# EAGLE board LIGHT MODULE-Panel (EAGLE 9.6.2), part 1 of 2
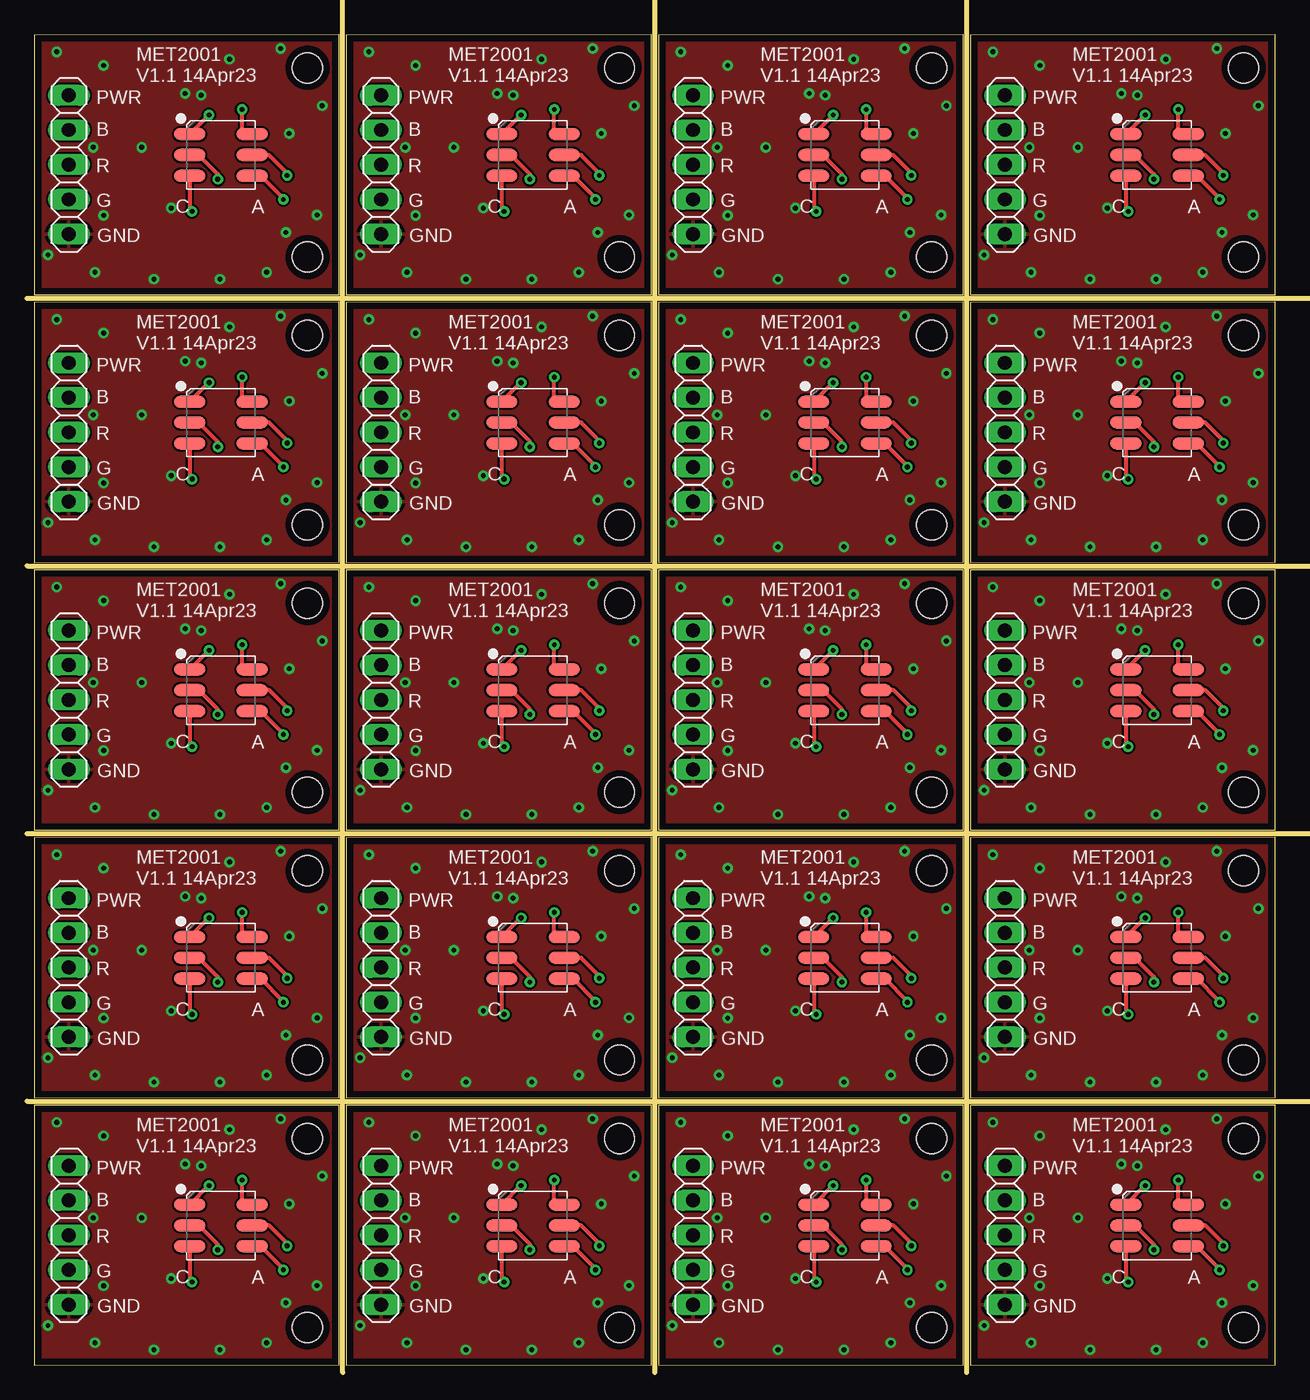
[diagram p0: board, top side]
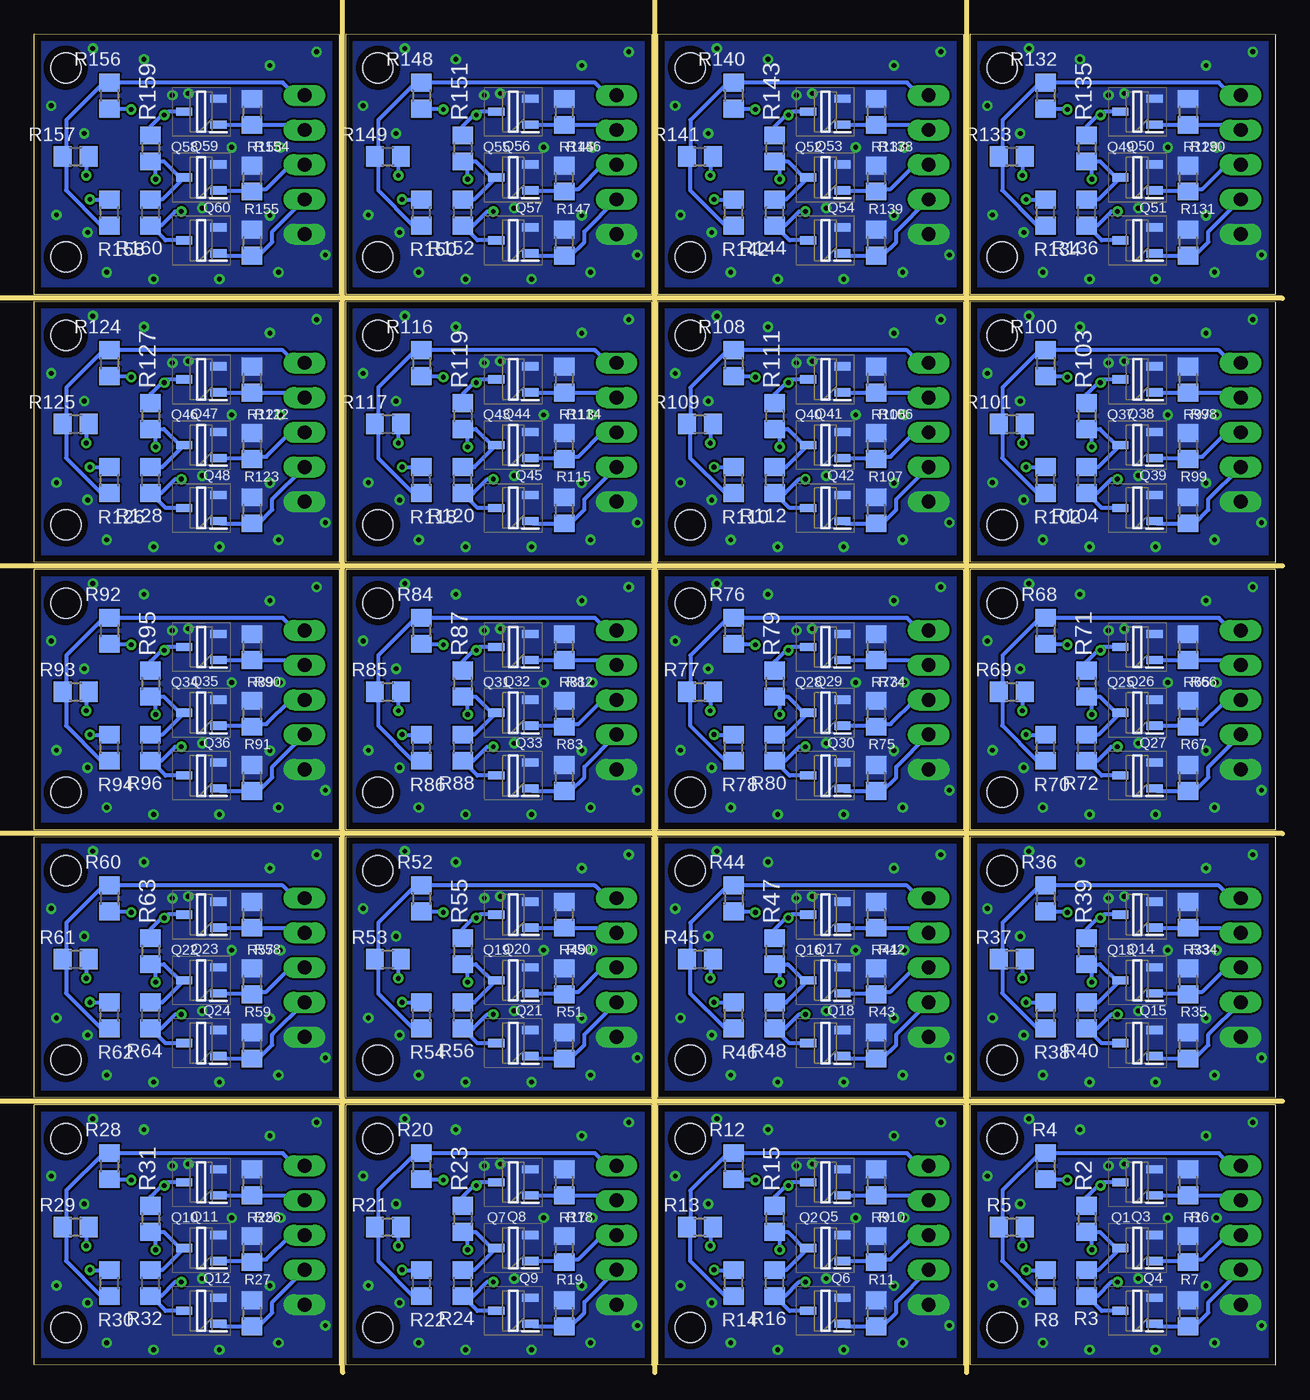
[diagram p1: board, bottom side, seen from below]

Size 90.84 x 97.42 mm. Coordinates in mm from the lower left corner, seen from the top.
Outline: 0,0 22.33,0.03 22.33,19.07 0,19.05 0,0
Outline: 22.84,0 45.16,0.03 45.16,19.07 22.84,19.05 22.84,0
Outline: 45.67,0 68,0.03 68,19.07 45.67,19.05 45.67,0
Outline: 68.51,0 90.83,0.03 90.83,19.07 68.51,19.05 68.51,0
Outline: 0,19.59 22.33,19.61 22.33,38.66 0,38.64 0,19.59
Outline: 22.84,19.59 45.16,19.61 45.16,38.66 22.84,38.64 22.84,19.59
Outline: 45.67,19.59 68,19.61 68,38.66 45.67,38.64 45.67,19.59
Outline: 68.51,19.59 90.83,19.61 90.83,38.66 68.51,38.64 68.51,19.59
Outline: 0,39.17 22.33,39.2 22.33,58.25 0,58.22 0,39.17
Outline: 22.84,39.17 45.16,39.2 45.16,58.25 22.84,58.22 22.84,39.17
Outline: 45.67,39.17 68,39.2 68,58.25 45.67,58.22 45.67,39.17
Outline: 68.51,39.17 90.83,39.2 90.83,58.25 68.51,58.22 68.51,39.17
Outline: 0,58.76 22.33,58.78 22.33,77.83 0,77.81 0,58.76
Outline: 22.84,58.76 45.16,58.78 45.16,77.83 22.84,77.81 22.84,58.76
Outline: 45.67,58.76 68,58.78 68,77.83 45.67,77.81 45.67,58.76
Outline: 68.51,58.76 90.83,58.78 90.83,77.83 68.51,77.81 68.51,58.76
Outline: 0,78.34 22.33,78.37 22.33,97.42 0,97.39 0,78.34
Outline: 22.84,78.34 45.16,78.37 45.16,97.42 22.84,97.39 22.84,78.34
Outline: 45.67,78.34 68,78.37 68,97.42 45.67,97.39 45.67,78.34
Outline: 68.51,78.34 90.83,78.37 90.83,97.42 68.51,97.39 68.51,78.34
Copper layers (1*16): Top 0.035mm / dielectric 1.5mm / Bottom 0.035mm
Design rules "LIGHT MODULE": minimum track width 10mil, minimum drill 0.35mm, track to track 6mil, track to pad 6mil, pad to pad 6mil, via to via 6mil, smd to smd 6mil, copper to edge 20mil, drill to drill 6mil, minimum pad ring 10mil, minimum via ring 8mil, stop-mask expansion 4mil, vias tented up to drill 15mil, thermal gap 10mil
Holes 2.2 mm at 20,2.77 20,16.61 42.84,2.77 42.84,16.61 65.67,2.77 65.67,16.61 88.51,2.77 88.51,16.61 20,22.36 20,36.19 42.84,22.36 42.84,36.19 65.67,22.36 65.67,36.19 88.51,22.36 88.51,36.19 20,41.94 20,55.78 42.84,41.94 42.84,55.78 65.67,41.94 65.67,55.78 88.51,41.94 88.51,55.78 20,61.53 20,75.36 42.84,61.53 42.84,75.36 65.67,61.53 65.67,75.36 88.51,61.53 88.51,75.36 20,81.11 20,94.95 42.84,81.11 42.84,94.95 65.67,81.11 65.67,94.95 88.51,81.11 88.51,94.95
Milling: 7 lines

## Footprints (pad centres in the part's own frame; a part is rotated, then mirrored left to right if it is on the bottom)
HEADER_1X5 = drill 1.016 long: 1 -6.35,0; 2 -3.81,0; 3 -1.27,0; 4 1.27,0; 5 3.81,0
LED6-SMD-5050 = smd 2.286 x 0.889: 1 -2.286,1.524; 2 -2.286,0; 3 -2.286,-1.524; 4 2.286,-1.524; 5 2.286,0; 6 2.286,1.524
SOT95P280X125-3N = smd 1.2 x 0.6: 1 -1.25,0.95; 2 -1.25,-0.95; 3 1.25,0
R0805 = smd 1.3 x 1.5: 1 -0.95,0; 2 0.95,0

## Placement (x,y rotation side)
CN1  [HEADER_1X5]  2.54,10.79 90 top
CN2  [HEADER_1X5]  25.38,10.79 90 top
CN3  [HEADER_1X5]  48.21,10.79 90 top
CN4  [HEADER_1X5]  71.05,10.79 90 top
CN5  [HEADER_1X5]  2.54,30.38 90 top
CN6  [HEADER_1X5]  25.38,30.38 90 top
CN7  [HEADER_1X5]  48.21,30.38 90 top
CN8  [HEADER_1X5]  71.05,30.38 90 top
CN9  [HEADER_1X5]  2.54,49.97 90 top
CN10  [HEADER_1X5]  25.38,49.97 90 top
CN11  [HEADER_1X5]  48.21,49.97 90 top
CN12  [HEADER_1X5]  71.05,49.97 90 top
CN13  [HEADER_1X5]  2.54,69.55 90 top
CN14  [HEADER_1X5]  25.38,69.55 90 top
CN15  [HEADER_1X5]  48.21,69.55 90 top
CN16  [HEADER_1X5]  71.05,69.55 90 top
CN17  [HEADER_1X5]  2.54,89.14 90 top
CN18  [HEADER_1X5]  25.38,89.14 90 top
CN19  [HEADER_1X5]  48.21,89.14 90 top
CN20  [HEADER_1X5]  71.05,89.14 90 top
D1  SMD-RGB-HI-LIGHT(6P-L5.0W5.0*H1.5MM)-5050  [LED6-SMD-5050]  13.67,10.24 0 top
D2  SMD-RGB-HI-LIGHT(6P-L5.0W5.0*H1.5MM)-5050  [LED6-SMD-5050]  36.5,10.24 0 top
D3  SMD-RGB-HI-LIGHT(6P-L5.0W5.0*H1.5MM)-5050  [LED6-SMD-5050]  59.34,10.24 0 top
D4  SMD-RGB-HI-LIGHT(6P-L5.0W5.0*H1.5MM)-5050  [LED6-SMD-5050]  82.17,10.24 0 top
D5  SMD-RGB-HI-LIGHT(6P-L5.0W5.0*H1.5MM)-5050  [LED6-SMD-5050]  13.67,29.82 0 top
D6  SMD-RGB-HI-LIGHT(6P-L5.0W5.0*H1.5MM)-5050  [LED6-SMD-5050]  36.5,29.82 0 top
D7  SMD-RGB-HI-LIGHT(6P-L5.0W5.0*H1.5MM)-5050  [LED6-SMD-5050]  59.34,29.82 0 top
D8  SMD-RGB-HI-LIGHT(6P-L5.0W5.0*H1.5MM)-5050  [LED6-SMD-5050]  82.17,29.82 0 top
D9  SMD-RGB-HI-LIGHT(6P-L5.0W5.0*H1.5MM)-5050  [LED6-SMD-5050]  13.67,49.41 0 top
D10  SMD-RGB-HI-LIGHT(6P-L5.0W5.0*H1.5MM)-5050  [LED6-SMD-5050]  36.5,49.41 0 top
D11  SMD-RGB-HI-LIGHT(6P-L5.0W5.0*H1.5MM)-5050  [LED6-SMD-5050]  59.34,49.41 0 top
D12  SMD-RGB-HI-LIGHT(6P-L5.0W5.0*H1.5MM)-5050  [LED6-SMD-5050]  82.17,49.41 0 top
D13  SMD-RGB-HI-LIGHT(6P-L5.0W5.0*H1.5MM)-5050  [LED6-SMD-5050]  13.67,68.99 0 top
D14  SMD-RGB-HI-LIGHT(6P-L5.0W5.0*H1.5MM)-5050  [LED6-SMD-5050]  36.5,68.99 0 top
D15  SMD-RGB-HI-LIGHT(6P-L5.0W5.0*H1.5MM)-5050  [LED6-SMD-5050]  59.34,68.99 0 top
D16  SMD-RGB-HI-LIGHT(6P-L5.0W5.0*H1.5MM)-5050  [LED6-SMD-5050]  82.17,68.99 0 top
D17  SMD-RGB-HI-LIGHT(6P-L5.0W5.0*H1.5MM)-5050  [LED6-SMD-5050]  13.67,88.58 0 top
D18  SMD-RGB-HI-LIGHT(6P-L5.0W5.0*H1.5MM)-5050  [LED6-SMD-5050]  36.5,88.58 0 top
D19  SMD-RGB-HI-LIGHT(6P-L5.0W5.0*H1.5MM)-5050  [LED6-SMD-5050]  59.34,88.58 0 top
D20  SMD-RGB-HI-LIGHT(6P-L5.0W5.0*H1.5MM)-5050  [LED6-SMD-5050]  82.17,88.58 0 top
Q1  AO3400  [SOT95P280X125-3N]  10.1,8.59 180 bottom
Q2  AO3400  [SOT95P280X125-3N]  32.94,8.59 180 bottom
Q3  AO3400  [SOT95P280X125-3N]  10.1,13.4 180 bottom
Q4  AO3400  [SOT95P280X125-3N]  10.1,3.99 180 bottom
Q5  AO3400  [SOT95P280X125-3N]  32.94,13.4 180 bottom
Q6  AO3400  [SOT95P280X125-3N]  32.94,3.99 180 bottom
Q7  AO3400  [SOT95P280X125-3N]  55.77,8.59 180 bottom
Q8  AO3400  [SOT95P280X125-3N]  55.77,13.4 180 bottom
Q9  AO3400  [SOT95P280X125-3N]  55.77,3.99 180 bottom
Q10  AO3400  [SOT95P280X125-3N]  78.61,8.59 180 bottom
Q11  AO3400  [SOT95P280X125-3N]  78.61,13.4 180 bottom
Q12  AO3400  [SOT95P280X125-3N]  78.61,3.99 180 bottom
Q13  AO3400  [SOT95P280X125-3N]  10.1,28.17 180 bottom
Q14  AO3400  [SOT95P280X125-3N]  10.1,32.98 180 bottom
Q15  AO3400  [SOT95P280X125-3N]  10.1,23.57 180 bottom
Q16  AO3400  [SOT95P280X125-3N]  32.94,28.17 180 bottom
Q17  AO3400  [SOT95P280X125-3N]  32.94,32.98 180 bottom
Q18  AO3400  [SOT95P280X125-3N]  32.94,23.57 180 bottom
Q19  AO3400  [SOT95P280X125-3N]  55.77,28.17 180 bottom
Q20  AO3400  [SOT95P280X125-3N]  55.77,32.98 180 bottom
Q21  AO3400  [SOT95P280X125-3N]  55.77,23.57 180 bottom
Q22  AO3400  [SOT95P280X125-3N]  78.61,28.17 180 bottom
Q23  AO3400  [SOT95P280X125-3N]  78.61,32.98 180 bottom
Q24  AO3400  [SOT95P280X125-3N]  78.61,23.57 180 bottom
Q25  AO3400  [SOT95P280X125-3N]  10.1,47.76 180 bottom
Q26  AO3400  [SOT95P280X125-3N]  10.1,52.57 180 bottom
Q27  AO3400  [SOT95P280X125-3N]  10.1,43.16 180 bottom
Q28  AO3400  [SOT95P280X125-3N]  32.94,47.76 180 bottom
Q29  AO3400  [SOT95P280X125-3N]  32.94,52.57 180 bottom
Q30  AO3400  [SOT95P280X125-3N]  32.94,43.16 180 bottom
Q31  AO3400  [SOT95P280X125-3N]  55.77,47.76 180 bottom
Q32  AO3400  [SOT95P280X125-3N]  55.77,52.57 180 bottom
Q33  AO3400  [SOT95P280X125-3N]  55.77,43.16 180 bottom
Q34  AO3400  [SOT95P280X125-3N]  78.61,47.76 180 bottom
Q35  AO3400  [SOT95P280X125-3N]  78.61,52.57 180 bottom
Q36  AO3400  [SOT95P280X125-3N]  78.61,43.16 180 bottom
Q37  AO3400  [SOT95P280X125-3N]  10.1,67.34 180 bottom
Q38  AO3400  [SOT95P280X125-3N]  10.1,72.15 180 bottom
Q39  AO3400  [SOT95P280X125-3N]  10.1,62.74 180 bottom
Q40  AO3400  [SOT95P280X125-3N]  32.94,67.34 180 bottom
Q41  AO3400  [SOT95P280X125-3N]  32.94,72.15 180 bottom
Q42  AO3400  [SOT95P280X125-3N]  32.94,62.74 180 bottom
Q43  AO3400  [SOT95P280X125-3N]  55.77,67.34 180 bottom
Q44  AO3400  [SOT95P280X125-3N]  55.77,72.15 180 bottom
Q45  AO3400  [SOT95P280X125-3N]  55.77,62.74 180 bottom
Q46  AO3400  [SOT95P280X125-3N]  78.61,67.34 180 bottom
Q47  AO3400  [SOT95P280X125-3N]  78.61,72.15 180 bottom
Q48  AO3400  [SOT95P280X125-3N]  78.61,62.74 180 bottom
Q49  AO3400  [SOT95P280X125-3N]  10.1,86.93 180 bottom
Q50  AO3400  [SOT95P280X125-3N]  10.1,91.74 180 bottom
Q51  AO3400  [SOT95P280X125-3N]  10.1,82.33 180 bottom
Q52  AO3400  [SOT95P280X125-3N]  32.94,86.93 180 bottom
Q53  AO3400  [SOT95P280X125-3N]  32.94,91.74 180 bottom
Q54  AO3400  [SOT95P280X125-3N]  32.94,82.33 180 bottom
Q55  AO3400  [SOT95P280X125-3N]  55.77,86.93 180 bottom
Q56  AO3400  [SOT95P280X125-3N]  55.77,91.74 180 bottom
Q57  AO3400  [SOT95P280X125-3N]  55.77,82.33 180 bottom
Q58  AO3400  [SOT95P280X125-3N]  78.61,86.93 180 bottom
Q59  AO3400  [SOT95P280X125-3N]  78.61,91.74 180 bottom
Q60  AO3400  [SOT95P280X125-3N]  78.61,82.33 180 bottom
R1  10K  [R0805]  6.38,13.39 270 bottom
R2  0  [R0805]  13.8,10.72 270 bottom
R3  0  [R0805]  13.8,6.02 90 bottom
R4  51  [R0805]  16.81,14.58 270 bottom
R5  51  [R0805]  19.28,10.13 0 bottom
R6  10K  [R0805]  6.38,8.51 270 bottom
R7  10K  [R0805]  6.38,3.81 270 bottom
R8  51  [R0805]  16.81,6.02 90 bottom
R9  10K  [R0805]  29.22,13.39 270 bottom
R10  10K  [R0805]  29.22,8.51 270 bottom
R11  10K  [R0805]  29.22,3.81 270 bottom
R12  51  [R0805]  39.65,14.58 270 bottom
R13  51  [R0805]  42.12,10.13 0 bottom
R14  51  [R0805]  39.65,6.02 90 bottom
R15  0  [R0805]  36.64,10.72 270 bottom
R16  0  [R0805]  36.64,6.02 90 bottom
R17  10K  [R0805]  52.05,13.39 270 bottom
R18  10K  [R0805]  52.05,8.51 270 bottom
R19  10K  [R0805]  52.05,3.81 270 bottom
R20  51  [R0805]  62.48,14.58 270 bottom
R21  51  [R0805]  64.95,10.13 0 bottom
R22  51  [R0805]  62.48,6.02 90 bottom
R23  0  [R0805]  59.47,10.72 270 bottom
R24  0  [R0805]  59.47,6.02 90 bottom
R25  10K  [R0805]  74.89,13.39 270 bottom
R26  10K  [R0805]  74.89,8.51 270 bottom
R27  10K  [R0805]  74.89,3.81 270 bottom
R28  51  [R0805]  85.32,14.58 270 bottom
R29  51  [R0805]  87.79,10.13 0 bottom
R30  51  [R0805]  85.32,6.02 90 bottom
R31  0  [R0805]  82.31,10.72 270 bottom
R32  0  [R0805]  82.31,6.02 90 bottom
R33  10K  [R0805]  6.38,32.97 270 bottom
R34  10K  [R0805]  6.38,28.09 270 bottom
R35  10K  [R0805]  6.38,23.4 270 bottom
R36  51  [R0805]  16.81,34.17 270 bottom
R37  51  [R0805]  19.28,29.72 0 bottom
R38  51  [R0805]  16.81,25.61 90 bottom
R39  0  [R0805]  13.8,30.3 270 bottom
R40  0  [R0805]  13.8,25.61 90 bottom
R41  10K  [R0805]  29.22,32.97 270 bottom
R42  10K  [R0805]  29.22,28.09 270 bottom
R43  10K  [R0805]  29.22,23.4 270 bottom
R44  51  [R0805]  39.65,34.17 270 bottom
R45  51  [R0805]  42.12,29.72 0 bottom
R46  51  [R0805]  39.65,25.61 90 bottom
R47  0  [R0805]  36.64,30.3 270 bottom
R48  0  [R0805]  36.64,25.61 90 bottom
R49  10K  [R0805]  52.05,32.97 270 bottom
R50  10K  [R0805]  52.05,28.09 270 bottom
R51  10K  [R0805]  52.05,23.4 270 bottom
R52  51  [R0805]  62.48,34.17 270 bottom
R53  51  [R0805]  64.95,29.72 0 bottom
R54  51  [R0805]  62.48,25.61 90 bottom
R55  0  [R0805]  59.47,30.3 270 bottom
R56  0  [R0805]  59.47,25.61 90 bottom
R57  10K  [R0805]  74.89,32.97 270 bottom
R58  10K  [R0805]  74.89,28.09 270 bottom
R59  10K  [R0805]  74.89,23.4 270 bottom
R60  51  [R0805]  85.32,34.17 270 bottom
R61  51  [R0805]  87.79,29.72 0 bottom
R62  51  [R0805]  85.32,25.61 90 bottom
R63  0  [R0805]  82.31,30.3 270 bottom
R64  0  [R0805]  82.31,25.61 90 bottom
R65  10K  [R0805]  6.38,52.56 270 bottom
R66  10K  [R0805]  6.38,47.68 270 bottom
R67  10K  [R0805]  6.38,42.98 270 bottom
R68  51  [R0805]  16.81,53.75 270 bottom
R69  51  [R0805]  19.28,49.31 0 bottom
R70  51  [R0805]  16.81,45.19 90 bottom
R71  0  [R0805]  13.8,49.89 270 bottom
R72  0  [R0805]  13.8,45.19 90 bottom
R73  10K  [R0805]  29.22,52.56 270 bottom
R74  10K  [R0805]  29.22,47.68 270 bottom
R75  10K  [R0805]  29.22,42.98 270 bottom
R76  51  [R0805]  39.65,53.75 270 bottom
R77  51  [R0805]  42.12,49.31 0 bottom
R78  51  [R0805]  39.65,45.19 90 bottom
R79  0  [R0805]  36.64,49.89 270 bottom
R80  0  [R0805]  36.64,45.19 90 bottom
R81  10K  [R0805]  52.05,52.56 270 bottom
R82  10K  [R0805]  52.05,47.68 270 bottom
R83  10K  [R0805]  52.05,42.98 270 bottom
R84  51  [R0805]  62.48,53.75 270 bottom
R85  51  [R0805]  64.95,49.31 0 bottom
R86  51  [R0805]  62.48,45.19 90 bottom
R87  0  [R0805]  59.47,49.89 270 bottom
R88  0  [R0805]  59.47,45.19 90 bottom
R89  10K  [R0805]  74.89,52.56 270 bottom
R90  10K  [R0805]  74.89,47.68 270 bottom
R91  10K  [R0805]  74.89,42.98 270 bottom
R92  51  [R0805]  85.32,53.75 270 bottom
R93  51  [R0805]  87.79,49.31 0 bottom
R94  51  [R0805]  85.32,45.19 90 bottom
R95  0  [R0805]  82.31,49.89 270 bottom
R96  0  [R0805]  82.31,45.19 90 bottom
R97  10K  [R0805]  6.38,72.14 270 bottom
R98  10K  [R0805]  6.38,67.26 270 bottom
R99  10K  [R0805]  6.38,62.57 270 bottom
R100  51  [R0805]  16.81,73.33 270 bottom
R101  51  [R0805]  19.28,68.89 0 bottom
R102  51  [R0805]  16.81,64.78 90 bottom
R103  0  [R0805]  13.8,69.47 270 bottom
R104  0  [R0805]  13.8,64.78 90 bottom
R105  10K  [R0805]  29.22,72.14 270 bottom
R106  10K  [R0805]  29.22,67.26 270 bottom
R107  10K  [R0805]  29.22,62.57 270 bottom
R108  51  [R0805]  39.65,73.33 270 bottom
R109  51  [R0805]  42.12,68.89 0 bottom
R110  51  [R0805]  39.65,64.78 90 bottom
R111  0  [R0805]  36.64,69.47 270 bottom
R112  0  [R0805]  36.64,64.78 90 bottom
R113  10K  [R0805]  52.05,72.14 270 bottom
R114  10K  [R0805]  52.05,67.26 270 bottom
R115  10K  [R0805]  52.05,62.57 270 bottom
R116  51  [R0805]  62.48,73.33 270 bottom
R117  51  [R0805]  64.95,68.89 0 bottom
R118  51  [R0805]  62.48,64.78 90 bottom
R119  0  [R0805]  59.47,69.47 270 bottom
R120  0  [R0805]  59.47,64.78 90 bottom
R121  10K  [R0805]  74.89,72.14 270 bottom
R122  10K  [R0805]  74.89,67.26 270 bottom
R123  10K  [R0805]  74.89,62.57 270 bottom
R124  51  [R0805]  85.32,73.33 270 bottom
R125  51  [R0805]  87.79,68.89 0 bottom
R126  51  [R0805]  85.32,64.78 90 bottom
R127  0  [R0805]  82.31,69.47 270 bottom
R128  0  [R0805]  82.31,64.78 90 bottom
R129  10K  [R0805]  6.38,91.73 270 bottom
R130  10K  [R0805]  6.38,86.85 270 bottom
R131  10K  [R0805]  6.38,82.15 270 bottom
R132  51  [R0805]  16.81,92.92 270 bottom
R133  51  [R0805]  19.28,88.48 0 bottom
R134  51  [R0805]  16.81,84.36 90 bottom
R135  0  [R0805]  13.8,89.06 270 bottom
R136  0  [R0805]  13.8,84.36 90 bottom
R137  10K  [R0805]  29.22,91.73 270 bottom
R138  10K  [R0805]  29.22,86.85 270 bottom
R139  10K  [R0805]  29.22,82.15 270 bottom
R140  51  [R0805]  39.65,92.92 270 bottom
R141  51  [R0805]  42.12,88.48 0 bottom
R142  51  [R0805]  39.65,84.36 90 bottom
R143  0  [R0805]  36.64,89.06 270 bottom
R144  0  [R0805]  36.64,84.36 90 bottom
R145  10K  [R0805]  52.05,91.73 270 bottom
R146  10K  [R0805]  52.05,86.85 270 bottom
R147  10K  [R0805]  52.05,82.15 270 bottom
R148  51  [R0805]  62.48,92.92 270 bottom
R149  51  [R0805]  64.95,88.48 0 bottom
R150  51  [R0805]  62.48,84.36 90 bottom
R151  0  [R0805]  59.47,89.06 270 bottom
R152  0  [R0805]  59.47,84.36 90 bottom
R153  10K  [R0805]  74.89,91.73 270 bottom
R154  10K  [R0805]  74.89,86.85 270 bottom
R155  10K  [R0805]  74.89,82.15 270 bottom
R156  51  [R0805]  85.32,92.92 270 bottom
R157  51  [R0805]  87.79,88.48 0 bottom
R158  51  [R0805]  85.32,84.36 90 bottom
R159  0  [R0805]  82.31,89.06 270 bottom
R160  0  [R0805]  82.31,84.36 90 bottom

## Library data of the parts
CN1-CN20 R1-R160 = Power
D1-D20 = SMD-RGB-HI-LIGHT_6P-L5.0_W5.0_H1.5MM_; AVAILABILITY: Unavailable; DESCRIPTION: Addressable Lighting - 1 LED Discrete PWM Red, Green, Blue (RGB) 5.00mm L x 5.00mm W; MF: SparkFun Electronics; MP: 5050RGB; PACKAGE: SparkFun Electronics; PRICE: None
Q1-Q60 = SamacSys_Parts; DESCRIPTION: 30V N-Channel MOSFET; HEIGHT: 1.25mm; MANUFACTURER_NAME: Alpha & Omega Semiconductors; MANUFACTURER_PART_NUMBER: AO3400

## Nets
+5VA: CN1.5 R4.1 R5.1 R8.1
+5VA1: CN2.5 R12.1 R13.1 R14.1
+5VA2: CN3.5 R20.1 R21.1 R22.1
+5VA3: CN4.5 R28.1 R29.1 R30.1
+5VA4: CN5.5 R36.1 R37.1 R38.1
+5VA5: CN6.5 R44.1 R45.1 R46.1
+5VA6: CN7.5 R52.1 R53.1 R54.1
+5VA7: CN8.5 R60.1 R61.1 R62.1
+5VA8: CN9.5 R68.1 R69.1 R70.1
+5VA9: CN10.5 R76.1 R77.1 R78.1
+5VA10: CN11.5 R84.1 R85.1 R86.1
+5VA11: CN12.5 R92.1 R93.1 R94.1
+5VA12: CN13.5 R100.1 R101.1 R102.1
+5VA13: CN14.5 R108.1 R109.1 R110.1
+5VA14: CN15.5 R116.1 R117.1 R118.1
+5VA15: CN16.5 R124.1 R125.1 R126.1
+5VA16: CN17.5 R132.1 R133.1 R134.1
+5VA17: CN18.5 R140.1 R141.1 R142.1
+5VA18: CN19.5 R148.1 R149.1 R150.1
+5VA19: CN20.5 R156.1 R157.1 R158.1
GNDD: CN1.1 Q1.2 Q3.2 Q4.2 R1.1 R6.1 R7.1
GNDD1: CN2.1 Q2.2 Q5.2 Q6.2 R9.1 R10.1 R11.1
GNDD2: CN3.1 Q7.2 Q8.2 Q9.2 R17.1 R18.1 R19.1
GNDD3: CN4.1 Q10.2 Q11.2 Q12.2 R25.1 R26.1 R27.1
GNDD4: CN5.1 Q13.2 Q14.2 Q15.2 R33.1 R34.1 R35.1
GNDD5: CN6.1 Q16.2 Q17.2 Q18.2 R41.1 R42.1 R43.1
GNDD6: CN7.1 Q19.2 Q20.2 Q21.2 R49.1 R50.1 R51.1
GNDD7: CN8.1 Q22.2 Q23.2 Q24.2 R57.1 R58.1 R59.1
GNDD8: CN9.1 Q25.2 Q26.2 Q27.2 R65.1 R66.1 R67.1
GNDD9: CN10.1 Q28.2 Q29.2 Q30.2 R73.1 R74.1 R75.1
GNDD10: CN11.1 Q31.2 Q32.2 Q33.2 R81.1 R82.1 R83.1
GNDD11: CN12.1 Q34.2 Q35.2 Q36.2 R89.1 R90.1 R91.1
GNDD12: CN13.1 Q37.2 Q38.2 Q39.2 R97.1 R98.1 R99.1
GNDD13: CN14.1 Q40.2 Q41.2 Q42.2 R105.1 R106.1 R107.1
GNDD14: CN15.1 Q43.2 Q44.2 Q45.2 R113.1 R114.1 R115.1
GNDD15: CN16.1 Q46.2 Q47.2 Q48.2 R121.1 R122.1 R123.1
GNDD16: CN17.1 Q49.2 Q50.2 Q51.2 R129.1 R130.1 R131.1
GNDD17: CN18.1 Q52.2 Q53.2 Q54.2 R137.1 R138.1 R139.1
GNDD18: CN19.1 Q55.2 Q56.2 Q57.2 R145.1 R146.1 R147.1
GNDD19: CN20.1 Q58.2 Q59.2 Q60.2 R153.1 R154.1 R155.1
N$1: CN1.4 Q3.1 R1.2
N$2: D1.4 R8.2
N$3: D1.5 R5.2
N$4: CN2.4 Q5.1 R9.2
N$5: D1.6 R4.2
N$6: CN1.3 Q1.1 R6.2
N$7: D1.1 Q3.3 R2.1
N$8: D1.2 Q1.3 R2.2 R3.2
N$9: D1.3 Q4.3 R3.1
N$10: CN2.3 Q2.1 R10.2
N$11: D2.1 Q5.3 R15.1
N$12: D2.2 Q2.3 R15.2 R16.2
N$13: D2.3 Q6.3 R16.1
N$14: CN2.2 Q6.1 R11.2
N$15: CN1.2 Q4.1 R7.2
N$16: D2.4 R14.2
N$17: D2.5 R13.2
N$18: D2.6 R12.2
N$19: CN3.4 Q8.1 R17.2
N$20: CN3.3 Q7.1 R18.2
N$21: D3.1 Q8.3 R23.1
N$22: D3.2 Q7.3 R23.2 R24.2
N$23: D3.3 Q9.3 R24.1
N$24: CN3.2 Q9.1 R19.2
N$25: D3.4 R22.2
N$26: D3.5 R21.2
N$27: D3.6 R20.2
N$28: CN4.4 Q11.1 R25.2
N$29: CN4.3 Q10.1 R26.2
N$30: D4.1 Q11.3 R31.1
N$31: D4.2 Q10.3 R31.2 R32.2
N$32: D4.3 Q12.3 R32.1
N$33: CN4.2 Q12.1 R27.2
N$34: D4.4 R30.2
N$35: D4.5 R29.2
N$36: D4.6 R28.2
N$37: CN5.4 Q14.1 R33.2
N$38: CN5.3 Q13.1 R34.2
N$39: D5.1 Q14.3 R39.1
N$40: D5.2 Q13.3 R39.2 R40.2
N$41: D5.3 Q15.3 R40.1
N$42: CN5.2 Q15.1 R35.2
N$43: D5.4 R38.2
N$44: D5.5 R37.2
N$45: D5.6 R36.2
N$46: CN6.4 Q17.1 R41.2
N$47: CN6.3 Q16.1 R42.2
N$48: D6.1 Q17.3 R47.1
N$49: D6.2 Q16.3 R47.2 R48.2
N$50: D6.3 Q18.3 R48.1
N$51: CN6.2 Q18.1 R43.2
N$52: D6.4 R46.2
N$53: D6.5 R45.2
N$54: D6.6 R44.2
N$55: CN7.4 Q20.1 R49.2
N$56: CN7.3 Q19.1 R50.2
N$57: D7.1 Q20.3 R55.1
N$58: D7.2 Q19.3 R55.2 R56.2
N$59: D7.3 Q21.3 R56.1
N$60: CN7.2 Q21.1 R51.2
N$61: D7.4 R54.2
N$62: D7.5 R53.2
N$63: D7.6 R52.2
N$64: CN8.4 Q23.1 R57.2
N$65: CN8.3 Q22.1 R58.2
N$66: D8.1 Q23.3 R63.1
N$67: D8.2 Q22.3 R63.2 R64.2
N$68: D8.3 Q24.3 R64.1
N$69: CN8.2 Q24.1 R59.2
N$70: D8.4 R62.2
N$71: D8.5 R61.2
N$72: D8.6 R60.2
N$73: CN9.4 Q26.1 R65.2
N$74: CN9.3 Q25.1 R66.2
N$75: D9.1 Q26.3 R71.1
N$76: D9.2 Q25.3 R71.2 R72.2
N$77: D9.3 Q27.3 R72.1
N$78: CN9.2 Q27.1 R67.2
N$79: D9.4 R70.2
N$80: D9.5 R69.2
N$81: D9.6 R68.2
N$82: CN10.4 Q29.1 R73.2
N$83: CN10.3 Q28.1 R74.2
N$84: D10.1 Q29.3 R79.1
N$85: D10.2 Q28.3 R79.2 R80.2
N$86: D10.3 Q30.3 R80.1
N$87: CN10.2 Q30.1 R75.2
N$88: D10.4 R78.2
N$89: D10.5 R77.2
N$90: D10.6 R76.2
N$91: CN11.4 Q32.1 R81.2
N$92: CN11.3 Q31.1 R82.2
N$93: D11.1 Q32.3 R87.1
N$94: D11.2 Q31.3 R87.2 R88.2
N$95: D11.3 Q33.3 R88.1
N$96: CN11.2 Q33.1 R83.2
N$97: D11.4 R86.2
N$98: D11.5 R85.2
N$99: D11.6 R84.2
N$100: CN12.4 Q35.1 R89.2
N$101: CN12.3 Q34.1 R90.2
N$102: D12.1 Q35.3 R95.1
N$103: D12.2 Q34.3 R95.2 R96.2
N$104: D12.3 Q36.3 R96.1
N$105: CN12.2 Q36.1 R91.2
N$106: D12.4 R94.2
N$107: D12.5 R93.2
N$108: D12.6 R92.2
N$109: CN13.4 Q38.1 R97.2
N$110: CN13.3 Q37.1 R98.2
N$111: D13.1 Q38.3 R103.1
N$112: D13.2 Q37.3 R103.2 R104.2
N$113: D13.3 Q39.3 R104.1
N$114: CN13.2 Q39.1 R99.2
N$115: D13.4 R102.2
N$116: D13.5 R101.2
N$117: D13.6 R100.2
N$118: CN14.4 Q41.1 R105.2
N$119: CN14.3 Q40.1 R106.2
N$120: D14.1 Q41.3 R111.1
N$121: D14.2 Q40.3 R111.2 R112.2
N$122: D14.3 Q42.3 R112.1
N$123: CN14.2 Q42.1 R107.2
N$124: D14.4 R110.2
N$125: D14.5 R109.2
N$126: D14.6 R108.2
N$127: CN15.4 Q44.1 R113.2
N$128: CN15.3 Q43.1 R114.2
N$129: D15.1 Q44.3 R119.1
N$130: D15.2 Q43.3 R119.2 R120.2
N$131: D15.3 Q45.3 R120.1
N$132: CN15.2 Q45.1 R115.2
N$133: D15.4 R118.2
N$134: D15.5 R117.2
N$135: D15.6 R116.2
N$136: CN16.4 Q47.1 R121.2
N$137: CN16.3 Q46.1 R122.2
N$138: D16.1 Q47.3 R127.1
N$139: D16.2 Q46.3 R127.2 R128.2
N$140: D16.3 Q48.3 R128.1
N$141: CN16.2 Q48.1 R123.2
N$142: D16.4 R126.2
N$143: D16.5 R125.2
N$144: D16.6 R124.2
N$145: CN17.4 Q50.1 R129.2
N$146: CN17.3 Q49.1 R130.2
N$147: D17.1 Q50.3 R135.1
N$148: D17.2 Q49.3 R135.2 R136.2
N$149: D17.3 Q51.3 R136.1
N$150: CN17.2 Q51.1 R131.2
N$151: D17.4 R134.2
N$152: D17.5 R133.2
N$153: D17.6 R132.2
N$154: CN18.4 Q53.1 R137.2
N$155: CN18.3 Q52.1 R138.2
N$156: D18.1 Q53.3 R143.1
N$157: D18.2 Q52.3 R143.2 R144.2
N$158: D18.3 Q54.3 R144.1
N$159: CN18.2 Q54.1 R139.2
N$160: D18.4 R142.2
N$161: D18.5 R141.2
N$162: D18.6 R140.2
N$163: CN19.4 Q56.1 R145.2
N$164: CN19.3 Q55.1 R146.2
N$165: D19.1 Q56.3 R151.1
N$166: D19.2 Q55.3 R151.2 R152.2
N$167: D19.3 Q57.3 R152.1
N$168: CN19.2 Q57.1 R147.2
N$169: D19.4 R150.2
N$170: D19.5 R149.2
N$171: D19.6 R148.2
N$172: CN20.4 Q59.1 R153.2
N$173: CN20.3 Q58.1 R154.2
N$174: D20.1 Q59.3 R159.1
N$175: D20.2 Q58.3 R159.2 R160.2
N$176: D20.3 Q60.3 R160.1
N$177: CN20.2 Q60.1 R155.2
N$178: D20.4 R158.2
N$179: D20.5 R157.2
N$180: D20.6 R156.2